# EAGLE board visca_1 (EAGLE 9.5.2)
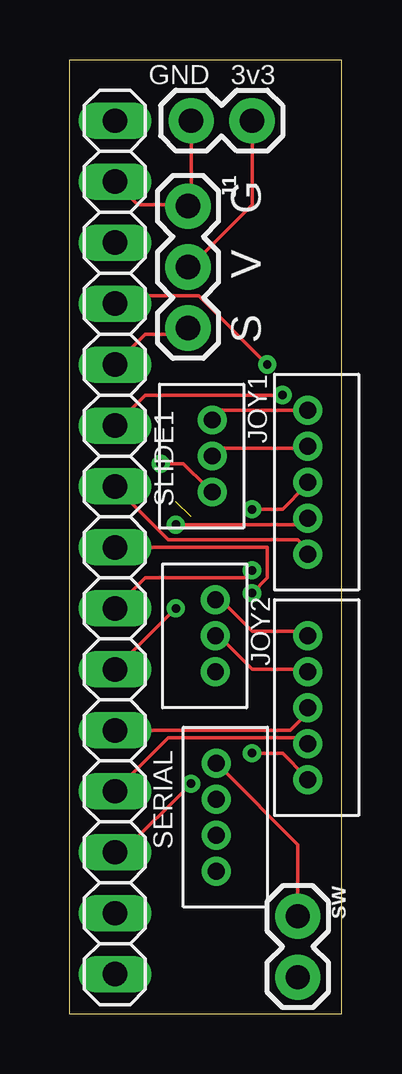
[diagram p0: board, top side]
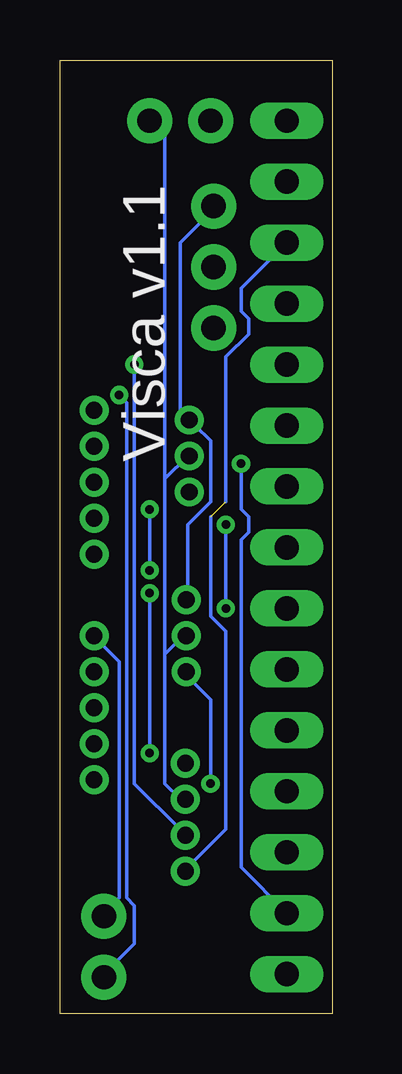
[diagram p1: board, bottom side, seen from below]

Size 11.35 x 39.74 mm. Coordinates in mm from the lower left corner, seen from the top.
Outline: 0,0 11.35,0 11.35,39.74 0,39.74 0,0
Copper layers (1*16): Top 0.035mm / dielectric 1.5mm / Bottom 0.035mm
Design rules "default": minimum track width 6mil, minimum drill 0.35mm, track to track 6mil, track to pad 6mil, pad to pad 6mil, via to via 6mil, smd to smd 6mil, copper to edge 40mil, drill to drill 6mil, minimum pad ring 10mil, minimum via ring 8mil, stop-mask expansion 4mil, vias tented up to drill 0mil, thermal gap 10mil

## Footprints (pad centres in the part's own frame; a part is rotated, then mirrored left to right if it is on the bottom)
1X15 = drill 1.016 long: 1 -17.78,0; 2 -15.24,0; 3 -12.7,0; 4 -10.16,0; 5 -7.62,0; 6 -5.08,0; 7 -2.54,0; 8 0,0; 9 2.54,0; 10 5.08,0; 11 7.62,0; 12 10.16,0; 13 12.7,0; 14 15.24,0; 15 17.78,0
1X03 = drill 1.016 pad 1.88: 1 0,0; 2 2.54,0; 3 5.08,0
B5B-ZR = drill 0.7: 1 7.5,-1.3; 2 6,-1.3; 3 4.5,-1.3; 4 3,-1.3; 5 1.5,-1.3
1X02 = drill 1.016 pad 1.88: 1 0,0; 2 2.54,0
B4B-ZR = drill 0.7: 1 6,-1.3; 2 4.5,-1.3; 3 3,-1.3; 4 1.5,-1.3
B3B-ZR = drill 0.7 pad 1.1: 1 -1.5,0; 2 0,0; 3 1.5,0

## Placement (x,y rotation side)
ESP32-RIGHT  0  [1X15]  1.91,19.43 270 top
J1  [1X03]  4.95,33.66 270 top
JOY1  B5B-ZR  [B5B-ZR]  8.64,17.65 90 top
JOY2  B5B-ZR  [B5B-ZR]  8.64,8.26 90 top
PWR  [1X02]  5.08,37.21 0 top
SERIAL  B4B-ZR  [B4B-ZR]  4.83,4.45 90 top
SLIDE1  B3B-ZR  [B3B-ZR]  5.97,23.24 270 top
SLIDE2  B3B-ZR  [B3B-ZR]  6.1,15.75 270 top
SW  [1X02]  9.53,4.06 270 top

## Library data of the parts
ESP32-RIGHT = pinhead
J1 PWR SW = SparkFun-Connectors
JOY1 JOY2 SERIAL SLIDE1 SLIDE2 = jst

## Nets
3V3: J1.2 JOY1.2 JOY2.2 PWR.2 SERIAL.2 SLIDE1.2 SLIDE2.2
D12: ESP32-RIGHT.4 SERIAL.3
D13: ESP32-RIGHT.3 SERIAL.4
D14: ESP32-RIGHT.5 J1.3
D25: ESP32-RIGHT.8 JOY2.5
D26: ESP32-RIGHT.7 JOY1.5
D27: ESP32-RIGHT.6 SW.2
D32: ESP32-RIGHT.10 JOY1.4
D33: ESP32-RIGHT.9 JOY1.3
GND: ESP32-RIGHT.2 J1.1 JOY1.1 JOY2.1 PWR.1 SERIAL.1 SLIDE1.1 SLIDE2.1 SW.1
I34: ESP32-RIGHT.12 JOY2.4
I35: ESP32-RIGHT.11 JOY2.3
I36: ESP32-RIGHT.14 SLIDE1.3
I39: ESP32-RIGHT.13 SLIDE2.3
RESET: ESP32-RIGHT.15
VIN: ESP32-RIGHT.1

## Tracks (layer width: path | path; a pad name or v marks a point on that pad's centre or on a via)
3V3
  Top 0.152: PWR.2 7.62,33.72 5.08,31.18 J1.2 | SLIDE1.2 6.03,23.24 6.35,23.56 9.84,23.56 JOY1.2 | SLIDE2.2 6.35,15.62 7.62,14.35 9.84,14.35 JOY2.2
  Bottom 0.152: 6.99,14.99 6.99,9.59 6.35,8.95 SERIAL.2 | 6.99,14.99 6.35,15.62 SLIDE2.2 | 6.99,22.29 6.03,23.24 SLIDE1.2 | 6.99,14.99 6.99,22.29 | PWR.2 6.99,36.58 6.99,22.29
D12  (via drill 0.35)
  Top 0.152: v8.26,27.05 5.4,29.91 2.22,29.91 ESP32-RIGHT.4
  Bottom 0.152: v8.26,27.05 8.26,9.59 6.35,7.68 SERIAL.3
D13  (1 unrouted)
  Bottom 0.152: 5.08,20.7 5.08,16.57 4.45,15.94 4.45,7.68 6.03,6.1 SERIAL.4 | 4.45,21.34 4.45,27.37 3.49,28.32 3.49,28.96 3.81,29.27 3.81,30.23 ESP32-RIGHT.3
D14
  Top 0.152: ESP32-RIGHT.5 3.17,28.32 4.76,28.32 J1.3
D25  (via drill 0.35)
  Top 0.152: v7.62,10.86 8.89,10.86 9.84,9.91 JOY2.5 | v7.62,17.53 8.26,18.16 8.26,19.43 ESP32-RIGHT.8
  Bottom 0.152: v7.62,17.53 v7.62,10.86
D26
  Top 0.152: ESP32-RIGHT.7 4.13,19.75 9.53,19.75 9.84,19.43 JOY1.5
D27  (via drill 0.35)
  Top 0.152: ESP32-RIGHT.6 3.17,25.78 v8.89,25.78
  Bottom 0.152: v8.89,25.78 8.57,25.46 8.57,4.83 8.26,4.51 8.26,2.92 9.53,1.65 SW.2
D32  (via drill 0.35)
  Top 0.152: v4.45,20.38 9.84,20.38 JOY1.4 | ESP32-RIGHT.10 v4.45,16.89
  Bottom 0.152: v4.45,16.89 v4.45,20.38
D33  (via drill 0.35)
  Top 0.152: v7.62,21.02 8.89,21.02 9.84,21.97 JOY1.3 | v7.62,18.48 7.3,18.16 3.17,18.16 ESP32-RIGHT.9
  Bottom 0.152: v7.62,18.48 v7.62,21.02
GND
  Top 0.152: SW.1 9.53,7.05 6.35,10.22 SERIAL.1 | ESP32-RIGHT.2 2.86,33.72 4.76,33.72 J1.1 5.08,33.72 PWR.1 | SLIDE1.1 6.03,24.83 6.35,25.15 9.84,25.15 JOY1.1 | SLIDE2.1 6.35,17.21 7.62,15.94 9.84,15.94 JOY2.1
  Bottom 0.152: SLIDE2.1 6.03,17.53 6.03,20.38 5.08,21.34 5.08,23.88 5.71,24.51 SLIDE1.1 6.03,24.83 6.35,25.15 6.35,32.13 5.08,33.4 J1.1 | SW.1 9.53,4.19 8.89,4.83 8.89,14.67 9.84,15.62 JOY2.1
I34
  Top 0.152: ESP32-RIGHT.12 4.13,11.49 9.84,11.49 JOY2.4
I35
  Top 0.152: ESP32-RIGHT.11 9.21,11.81 9.84,12.45 JOY2.3
I36  (via drill 0.35)
  Top 0.152: v3.81,22.92 4.76,22.92 5.71,21.97 SLIDE1.3
  Bottom 0.152: v3.81,22.92 3.81,21.02 3.49,20.7 3.49,20.07 3.81,19.75 3.81,6.1 ESP32-RIGHT.14
I39  (via drill 0.35)
  Top 0.152: v5.08,9.59 2.22,6.73 ESP32-RIGHT.13
  Bottom 0.152: v5.08,9.59 5.08,13.08 6.03,14.03 SLIDE2.3

## Text on the board
tNames: GND | 3v3 | S V G
bNames: Visca v1.1